# Altium PCB Column.PcbDoc (part 1 of 2)
Units mm, origin at the board's own origin, x right, y up, seen from the top; angles counter-clockwise.
Board outline 110.15 x 30.8 mm, 2 copper layers (Top Layer, Bottom Layer); 69 components, 210 nets, 1010 pads, 61 vias.
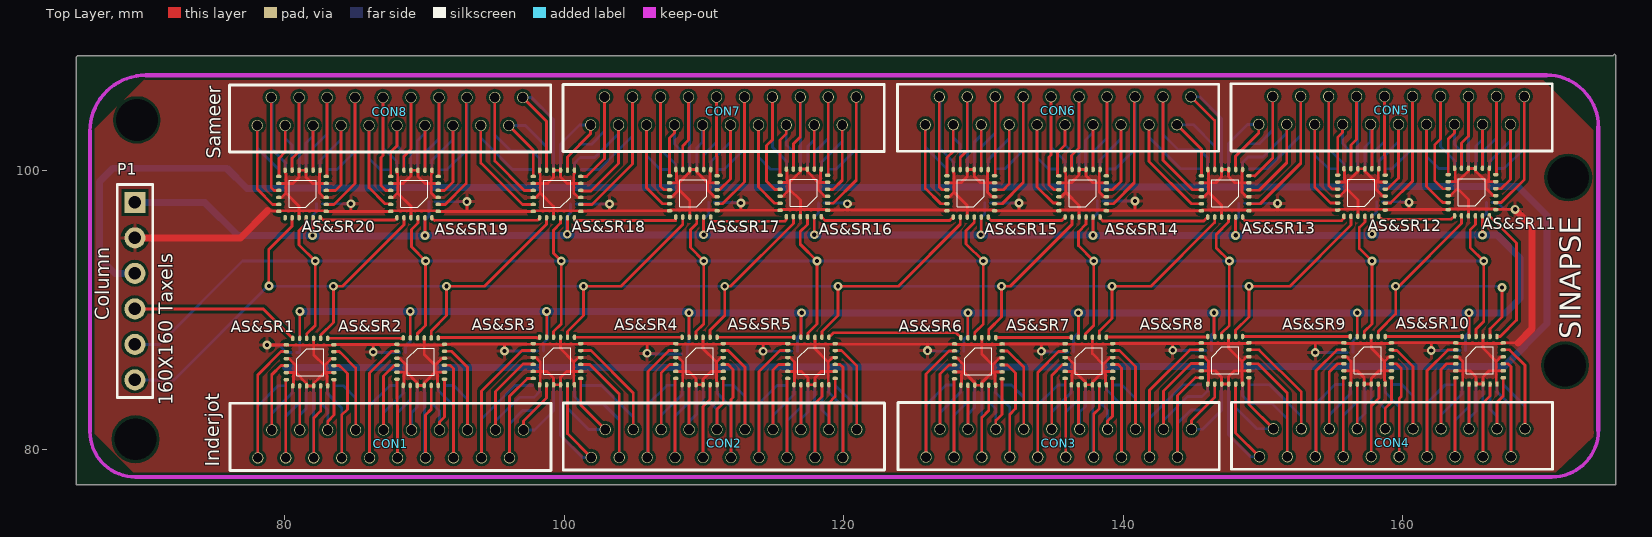
[diagram p0: Top Layer view]
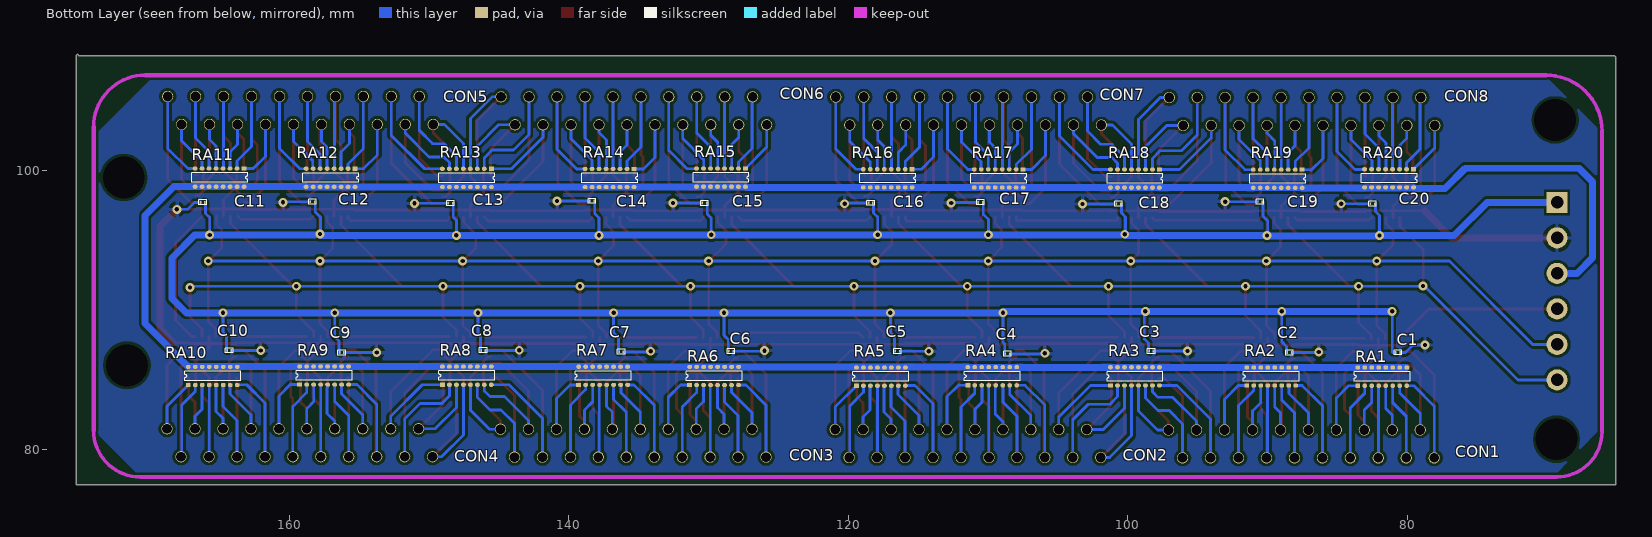
[diagram p1: Bottom Layer view, seen from below]

## Layer stack, top to bottom
Top Solder: solder mask 0.0102, Solder Resist, Dk 3.5
Top Layer: signal copper 0.0356
Dielectric 1: dielectric 0.32, FR-4, Dk 4.8
Bottom Layer: signal copper 0.0356
Bottom Solder: solder mask 0.0102, Solder Resist, Dk 3.5

## Board outline
65.2,108.2 175.05,108.2 175.15,108.3 175.25,108.2 175.25,77.5 65.1,77.5 65.1,78.3 65.1,108.1

## Design rules (kind name [scope] priority, off if disabled: settings)
Clearance [All] p1: gap=0.2 except(0.1: SMDPad-SMDPad THPad-THPad SMDPad-THPad; 0.25: Arc-Arc Arc-THPad Arc-Track Arc-SMDPad)
HoleSize [All] p1: absolutevalues=TRUE maxlimit=6 minlimit=0.3 maxpercent=80.000 minpercent=20.000
HoleToHoleClearance [All] p1: gap=0.3 allowstackedmicrovias=TRUE
MinimumSolderMaskSliver [All] p1: minsoldermaskwidth=0.08
PolygonConnect [All] p1: connectstyle=Relief reliefconductorwidth=0.254 reliefentries=4 polygonreliefangle="90 Angle" airgapwidth=0.254
RoutingCorners [All] p1: cornerstyle=45-Degree minsetback=2 maxsetback=2
RoutingTopology [All] p1: topology=Daisy_Simple
RoutingVias [All] p1: holewidth=0.305 width=0.635 viastyle="Through Hole" minholewidth=0.305 minwidth=0.635 maxholewidth=0.71 maxwidth=1.27
SilkToBoardRegionClearance [All] p1 off:
SilkToSilkClearance [All] p1 off: silktosilkclearance=0
SilkToSolderMaskClearance [All] p1 off: minsilkscreentomaskgap=0 clearancetoexposedcopper=TRUE
SolderMaskExpansion [All] p1: expansion=0.05
UnpouredPolygon [All] p1: allowunpoured=FALSE
Width [All] p1: maxlimit=0.8 minlimit=0.2 preferedwidth=0.2
21 further rules are at their usual default settings.

## Classes and differential pairs
component class Column: AS&SR1 AS&SR2 AS&SR3 AS&SR4 AS&SR5 C1 C2 C3 C4 C5 CON1 CON2 RA2 RA3 RA4 RA5 RA14

## Components (designator, comment, footprint, x,y, rotation, side; value= is the part's Value field where it differs from the comment)
AS&SR1 "ADG1414" LFCSP24 80.14,87.52 r0 top
AS&SR2 "ADG1414" LFCSP24 88.05,87.55 r0 top
AS&SR3 "ADG1414" LFCSP24 97.8,87.6 r0 top
AS&SR4 "ADG1414" LFCSP24 108,87.6 r0 top
AS&SR5 "ADG1414" LFCSP24 116,87.6 r0 top
AS&SR6 "ADG1414" LFCSP24 127.94,87.57 r0 top (schematic designator AS&SR1)
AS&SR7 "ADG1414" LFCSP24 135.85,87.6 r0 top (schematic designator AS&SR2)
AS&SR8 "ADG1414" LFCSP24 145.6,87.65 r0 top (schematic designator AS&SR3)
AS&SR9 "ADG1414" LFCSP24 155.8,87.65 r0 top (schematic designator AS&SR4)
AS&SR10 "ADG1414" LFCSP24 163.8,87.65 r0 top (schematic designator AS&SR5)
AS&SR11 "ADG1414" LFCSP24 166.66,97.18 r180 top (schematic designator AS&SR1)
AS&SR12 "ADG1414" LFCSP24 158.75,97.15 r180 top (schematic designator AS&SR2)
AS&SR13 "ADG1414" LFCSP24 149,97.1 r180 top (schematic designator AS&SR3)
AS&SR14 "ADG1414" LFCSP24 138.8,97.1 r180 top (schematic designator AS&SR4)
AS&SR15 "ADG1414" LFCSP24 130.8,97.1 r180 top (schematic designator AS&SR5)
AS&SR16 "ADG1414" LFCSP24 118.86,97.13 r180 top (schematic designator AS&SR1)
AS&SR17 "ADG1414" LFCSP24 110.95,97.1 r180 top (schematic designator AS&SR2)
AS&SR18 "ADG1414" LFCSP24 101.2,97.05 r180 top (schematic designator AS&SR3)
AS&SR19 "ADG1414" LFCSP24 91,97.05 r180 top (schematic designator AS&SR4)
AS&SR20 "ADG1414" LFCSP24 83,97.05 r180 top (schematic designator AS&SR5)
C1 "Cap" 0402 80.68,86.96 r0 bottom
C2 "Cap" 0402 88.45,86.95 r0 bottom
C3 "Cap" 0402 98.33,87.06 r0 bottom
C4 "Cap" 0402 108.62,86.86 r0 bottom
C5 "Cap" 0402 116.5,87.05 r0 bottom
C6 "Cap" 0402 128.4,87.05 r0 bottom (schematic designator C1)
C7 "Cap" 0402 136.25,87 r0 bottom (schematic designator C2)
C8 "Cap" 0402 146.13,87.11 r0 bottom (schematic designator C3)
C9 "Cap" 0402 156.25,86.95 r0 bottom (schematic designator C4)
C10 "Cap" 0402 164.3,87.1 r0 bottom (schematic designator C5)
C11 "Cap" 0402 166.2,97.7 r180 bottom (schematic designator C1)
C12 "Cap" 0402 158.35,97.75 r180 bottom (schematic designator C2)
C13 "Cap" 0402 148.47,97.64 r180 bottom (schematic designator C3)
C14 "Cap" 0402 138.35,97.8 r180 bottom (schematic designator C4)
C15 "Cap" 0402 130.3,97.65 r180 bottom (schematic designator C5)
C16 "Cap" 0402 118.4,97.65 r180 bottom (schematic designator C1)
C17 "Cap" 0402 110.55,97.7 r180 bottom (schematic designator C2)
C18 "Cap" 0402 100.67,97.59 r180 bottom (schematic designator C3)
C19 "Cap" 0402 90.55,97.75 r180 bottom (schematic designator C4)
C20 "Cap" 0402 82.5,97.6 r180 bottom (schematic designator C5)
CON1 "FFC_CON" FFC_THT_20_1 78.094,79.421 r0 top
CON2 "FFC_CON" FFC_THT_20_1 101.95,79.45 r0 top
CON3 "FFC_CON" FFC_THT_20_1 125.894,79.471 r0 top (schematic designator CON1)
CON4 "FFC_CON" FFC_THT_20_1 149.75,79.5 r0 top (schematic designator CON2)
CON5 "FFC_CON" FFC_THT_20_1 168.706,105.279 r180 top (schematic designator CON1)
CON6 "FFC_CON" FFC_THT_20_1 144.85,105.25 r180 top (schematic designator CON2)
CON7 "FFC_CON" FFC_THT_20_1 120.906,105.229 r180 top (schematic designator CON1)
CON8 "FFC_CON" FFC_THT_20_1 97.05,105.2 r180 top (schematic designator CON2)
P1 "Header 6" HDR1X6 69.3,97.7 r270 top
RA1 "RES_ARR" 0402X8 83.56,84.58 r90 bottom
RA2 "RES_ARR" 0402X8 91.5,84.59 r90 bottom
RA3 "RES_ARR" 0402X8 101.25,84.6 r90 bottom
RA4 "RES_ARR" 0402X8 111.46,84.61 r90 bottom
RA5 "RES_ARR" 0402X8 119.43,84.58 r90 bottom
RA6 "RES_ARR" 0402X8 131.36,84.63 r90 bottom (schematic designator RA1)
RA7 "RES_ARR" 0402X8 139.3,84.64 r90 bottom (schematic designator RA2)
RA8 "RES_ARR" 0402X8 149.05,84.65 r90 bottom (schematic designator RA3)
RA9 "RES_ARR" 0402X8 159.26,84.66 r90 bottom (schematic designator RA4)
RA10 "RES_ARR" 0402X8 167.23,84.63 r90 bottom (schematic designator RA5)
RA11 "RES_ARR" 0402X8 163.24,100.12 r270 bottom (schematic designator RA1)
RA12 "RES_ARR" 0402X8 155.3,100.11 r270 bottom (schematic designator RA2)
RA13 "RES_ARR" 0402X8 145.55,100.1 r270 bottom (schematic designator RA3)
RA14 "RES_ARR" 0402X8 135.34,100.09 r270 bottom (schematic designator RA4)
RA15 "RES_ARR" 0402X8 127.37,100.12 r270 bottom (schematic designator RA5)
RA16 "RES_ARR" 0402X8 115.44,100.07 r270 bottom (schematic designator RA1)
RA17 "RES_ARR" 0402X8 107.5,100.06 r270 bottom (schematic designator RA2)
RA18 "RES_ARR" 0402X8 97.75,100.05 r270 bottom (schematic designator RA3)
RA19 "RES_ARR" 0402X8 87.54,100.04 r270 bottom (schematic designator RA4)
RA20 "RES_ARR" 0402X8 79.57,100.07 r270 bottom (schematic designator RA5)

## Footprints (in the part's own frame and the unit in brackets; to place one, negate y for a bottom-side part, rotate by r counter-clockwise, add the part's x,y. Pads: shape width x height; smd on the part's side, far side on the other; paste and mask are expansions set on the pad)
0402 [mm]
  rect 0.1x0.2 smd mask+0.05: 1(-0.15,0) 2(0.15,0)
  silkscreen extent -0.28,-0.18 0.28,0.18
0402X8 [mm]
  rect 0.3x0.35 smd mask+0.03: 1(0,0)
  oval 0.3x0.35 smd mask+0.03: 2(0,-0.5) 3(0,-1) 4(0,-1.5) 5(0,-2) 6(0,-2.5) 7(0,-3) 8(0,-3.5) 9(1.3,-3.5) 10(1.3,-3) 11(1.3,-2.5) 12(1.3,-2) 13(1.3,-1.5) 14(1.3,-1) 15(1.3,-0.5) 16(1.3,0)
  silkscreen extent 0.32,-3.75 0.98,0.25
FFC_THT_20_1 [mm]
  round 0.8 hole 0.7 mask+0.2: 1(0,0) 2(1,2) 3(2,0) 4(3,2) 5(4,0) 6(5,2) 7(6,0) 8(7,2) 9(8,0) 10(9,2) 11(10,0) 12(11,2) 13(12,0) 14(13,2) 15(14,0) 16(15,2) 17(16,0) 18(17,2) 19(18,0) 20(19,2)
  silkscreen extent -2,-0.9 20.98,3.9
HDR1X6 [mm] "Connector; Header; 6 Position"
  rect 1.5x1.5 hole 0.9: 1(0,0)
  round 1.5 hole 0.9: 2(2.54,0) 3(5.08,0) 4(7.62,0) 5(10.16,0) 6(12.7,0)
  silkscreen extent -1.27,-1.27 13.97,1.27
LFCSP24 [mm]
  oval 0.4x0.25 smd mask+0.05: 1(0,0) 2(0,-0.5) 3(0,-1) 4(0,-1.5) 5(0,-2) 6(0,-2.5) 13(3.4,-2.5) 14(3.4,-2) 15(3.4,-1.5) 16(3.4,-1) 17(3.4,-0.5) 18(3.4,0)
  oval 0.25x0.4 smd mask+0.05: 7(0.45,-2.95) 8(0.95,-2.95) 9(1.45,-2.95) 10(1.95,-2.95) 11(2.45,-2.95) 12(2.95,-2.95) 19(2.95,0.45) 20(2.45,0.45) 21(1.95,0.45) 22(1.45,0.45) 23(0.95,0.45) 24(0.45,0.45)
  silkscreen extent 0.73,-2.21 2.66,-0.29

## Part data
AS&SR1 AS&SR2 AS&SR3 AS&SR4 AS&SR5 AS&SR6 AS&SR7 AS&SR8 AS&SR9 AS&SR10 AS&SR11 AS&SR12 AS&SR13 AS&SR14 AS&SR15 AS&SR16 AS&SR17 AS&SR18 AS&SR19 AS&SR20: "Analog Switches + Shift Registers"
C1 C2 C3 C4 C5 C6 C7 C8 C9 C10 C11 C12 C13 C14 C15 C16 C17 C18 C19 C20: "Capacitor"
CON1 CON2 CON3 CON4 CON5 CON6 CON7 CON8: library part FFC_20pin
P1: "Header, 6-Pin"
RA1 RA2 RA3 RA4 RA5 RA6 RA7 RA8 RA9 RA10 RA11 RA12 RA13 RA14 RA15 RA16 RA17 RA18 RA19 RA20: library part Resistor_Array

## Free pads (board coordinates)
  round 0 hole 3 mask+0: H(69.34,80.75) H(171.62,86.04) H(171.85,99.48)
  round 0 hole 3 paste+0 mask+0: H(69.44,103.6)

## Via types
v1: diameter 0.635, hole 0.305, Top Layer to Bottom Layer, 61 vias

## Nets (pads, with @x,y where several pads share a name; then routed paths per layer and width w, separated by ;. In a path a pad name is that pad's centre, name@x,y a point inside that pad or via, vN(x,y) a via of type N, cw(c..) or ccw(c..) an arc to the next point about the centre after c; other vN are vias at no path point)
C1: AS&SR1.2 CON1.1 RA1.8 | length 15
  Top Layer w0.2: CON1.1@78.094,79.421 78.094,85.367 79.747,87.02 AS&SR1.2@80.14,87.02
  Bottom Layer w0.2: CON1.1@78.094,79.421 78.094,83.134 79.54,84.58 RA1.8@80.06,84.58
C2: AS&SR1.4 CON1.2 RA1.7 | length 9
  Top Layer w0.2: CON1.2@79.094,81.421 79.094,85.367 79.747,86.02 AS&SR1.4@80.14,86.02
  Bottom Layer w0.2: CON1.2@79.094,81.421 79.094,82.594 80.56,84.06 RA1.7@80.56,84.58
C3: AS&SR1.6 CON1.3 RA1.6 | length 11.2
  Top Layer w0.2: CON1.3@80.094,79.421 AS&SR1.6@80.094,84.974 ; AS&SR1.6@80.094,84.974 AS&SR1.6@80.14,85.02 AS&SR1.6@80.094,84.974
  Bottom Layer w0.2: CON1.3@80.094,79.421 80.094,82.394 81.06,83.36 RA1.6@81.06,84.58
C4: AS&SR1.8 CON1.4 RA1.5 | length 6.5
  Top Layer w0.2: AS&SR1.8@81.09,84.57 81.094,84.566 CON1.4@81.094,81.421
  Bottom Layer w0.2: CON1.4@81.094,81.421 81.094,82.494 81.56,82.96 RA1.5@81.56,84.58
C5: AS&SR1.11 CON1.5 RA1.4 | length 10.5
  Top Layer w0.2: CON1.5@82.094,79.421 82.094,82.264 82.59,82.76 AS&SR1.11@82.59,84.57
  Bottom Layer w0.2: RA1.4@82.06,84.58 82.085,84.555 82.085,79.43 CON1.5@82.094,79.421
C6: AS&SR1.13 CON1.6 RA1.3 | length 7.2
  Top Layer w0.2: CON1.6@83.094,81.421 83.094,82.034 83.54,82.48 AS&SR1.13@83.54,85.02
  Bottom Layer w0.2: RA1.3@82.56,84.58 82.56,83.39 83.094,82.856 CON1.6@83.094,81.421
C7: AS&SR1.15 CON1.7 RA1.2 | length 13
  Top Layer w0.2: AS&SR1.15@83.54,86.02 83.933,86.02 84.008,85.945 84.51,85.443 84.51,82.89 84.094,82.474 CON1.7@84.094,79.421
  Bottom Layer w0.2: RA1.2@83.06,84.58 83.06,84.04 84.094,83.006 CON1.7@84.094,79.421
C8: AS&SR1.17 CON1.8 RA1.1 | length 10.7
  Top Layer w0.2: AS&SR1.17@83.54,87.02 83.933,87.02 84.008,86.945 85.094,85.859 CON1.8@85.094,81.421
  Bottom Layer w0.2: RA1.1@83.56,84.58 84.22,84.58 85.094,83.706 CON1.8@85.094,81.421
C9: AS&SR2.2 CON1.9 RA2.8 | length 14.9
  Top Layer w0.2: CON1.9@86.094,79.421 86.094,85.487 87.582,86.975 87.657,87.05 AS&SR2.2@88.05,87.05
  Bottom Layer w0.2: CON1.9@86.094,79.421 86.094,83.144 87.54,84.59 RA2.8@88,84.59
C10: AS&SR2.4 CON1.10 RA2.7 | length 8.9
  Top Layer w0.2: CON1.10@87.094,81.421 87.094,85.27 87.874,86.05 AS&SR2.4@88.05,86.05
  Bottom Layer w0.2: CON1.10@87.094,81.421 87.094,82.644 88.475,84.025 88.475,84.565 RA2.7@88.5,84.59
C11: AS&SR2.6 CON1.11 RA2.6 | length 11.2
  Top Layer w0.2: AS&SR2.6@88.059,85.05 88.059,83.686 88.075,83.67 88.075,83.149 88.094,83.13 CON1.11@88.094,79.421
  Bottom Layer w0.2: CON1.11@88.094,79.421 88.094,82.644 89,83.55 RA2.6@89,84.59
C12: AS&SR2.8 CON1.12 RA2.5 | length 6.6
  Top Layer w0.2: AS&SR2.8@89,84.6 89,81.515 CON1.12@89.094,81.421
  Bottom Layer w0.2: CON1.12@89.094,81.421 89.094,82.644 89.5,83.05 89.5,83.39 RA2.5@89.5,84.59
C13: AS&SR2.11 CON1.13 RA2.4 | length 10.6
  Top Layer w0.2: CON1.13@90.094,79.421 90.094,82.494 90.5,82.9 AS&SR2.11@90.5,84.6
  Bottom Layer w0.2: RA2.4@90,84.59 90.025,84.565 90.025,79.49 CON1.13@90.094,79.421
C14: AS&SR2.13 CON1.14 RA2.3 | length 7.2
  Top Layer w0.2: CON1.14@91.094,81.421 91.094,81.994 91.45,82.35 AS&SR2.13@91.45,85.05
  Bottom Layer w0.2: RA2.3@90.5,84.59 90.5,83.39 90.494,83.384 91.094,82.784 CON1.14@91.094,81.421
C15: AS&SR2.15 CON1.15 RA2.2 | length 12.8
  Top Layer w0.2: AS&SR2.15@91.45,86.05 91.85,86.05 92.094,85.806 CON1.15@92.094,79.421
  Bottom Layer w0.2: RA2.2@91,84.59 91,84.25 92.094,83.156 CON1.15@92.094,79.421
C16: AS&SR2.17 CON1.16 RA2.1 | length 10.8
  Top Layer w0.2: AS&SR2.17@91.45,87.05 91.95,87.05 93.094,85.906 CON1.16@93.094,81.421
  Bottom Layer w0.2: RA2.1@91.5,84.59 92.11,84.59 93.094,83.606 CON1.16@93.094,81.421
C17: AS&SR3.2 CON1.17 RA3.8 | length 17.1
  Top Layer w0.2: CON1.17@94.094,79.421 94.094,84.204 96.99,87.1 AS&SR3.2@97.8,87.1
  Bottom Layer w0.2: CON1.17@94.094,79.421 94.094,82.204 96.49,84.6 RA3.8@97.75,84.6
C18: AS&SR3.4 CON1.18 RA3.7 | length 11.4
  Top Layer w0.2: CON1.18@95.094,81.421 95.094,84.164 97.06,86.13 97.77,86.13 AS&SR3.4@97.8,86.1
  Bottom Layer w0.2: CON1.18@95.094,81.421 95.094,82.044 96.8,83.75 97.85,83.75 98.25,84.15 RA3.7@98.25,84.6
C19: AS&SR3.6 CON1.19 RA3.6 | length 13.4
  Top Layer w0.2: CON1.19@96.094,79.421 96.094,83.824 97.38,85.11 97.39,85.1 AS&SR3.6@97.8,85.1
  Bottom Layer w0.2: CON1.19@96.094,79.421 96.094,81.844 97.05,82.8 97.85,82.8 98.75,83.7 RA3.6@98.75,84.6
C20: AS&SR3.8 CON1.20 RA3.5 | length 8.5
  Top Layer w0.2: CON1.20@97.094,81.421 97.094,82.044 98.75,83.7 AS&SR3.8@98.75,84.65
  Bottom Layer w0.2: CON1.20@97.094,81.421 97.891,81.421 99.25,82.78 RA3.5@99.25,84.6
C21: AS&SR3.11 CON2.1 RA3.4 | length 12.3
  Top Layer w0.2: AS&SR3.11@100.25,84.65 100.25,81.15 CON2.1@101.95,79.45
  Bottom Layer w0.2: RA3.4@99.75,84.6 99.75,81.01 101.31,79.45 CON2.1@101.95,79.45
C22: AS&SR3.13 CON2.2 RA3.3 | length 9.3
  Top Layer w0.2: AS&SR3.13@101.2,85.1 101.2,83.2 CON2.2@102.95,81.45
  Bottom Layer w0.2: RA3.3@100.25,84.6 100.25,82.97 101.77,81.45 CON2.2@102.95,81.45
C23: AS&SR3.15 CON2.3 RA3.2 | length 15.5
  Top Layer w0.2: AS&SR3.15@101.2,86.1 101.84,86.1 103.95,83.99 CON2.3@103.95,79.45
  Bottom Layer w0.2: RA3.2@100.75,84.6 100.75,83.81 101.3,83.26 102.84,83.26 103.95,82.15 CON2.3@103.95,79.45
C24: AS&SR3.17 CON2.4 RA3.1 | length 13.2
  Top Layer w0.2: AS&SR3.17@101.2,87.1 101.92,87.1 104.95,84.07 CON2.4@104.95,81.45
  Bottom Layer w0.2: RA3.1@101.25,84.6 102.69,84.6 104.95,82.34 CON2.4@104.95,81.45
C25: AS&SR4.2 CON2.5 RA4.8 | length 15.1
  Top Layer w0.2: CON2.5@105.95,79.45 106,79.5 106,85.6 107.5,87.1 AS&SR4.2@108,87.1
  Bottom Layer w0.2: CON2.5@105.95,79.45 105.95,83.2 107.36,84.61 RA4.8@107.96,84.61
C26: AS&SR4.4 CON2.6 RA4.7 | length 9.1
  Top Layer w0.2: CON2.6@106.95,81.45 106.95,85.5 107.55,86.1 AS&SR4.4@108,86.1
  Bottom Layer w0.2: CON2.6@106.95,81.45 106.95,82.45 108.46,83.96 RA4.7@108.46,84.61
C27: AS&SR4.6 CON2.7 RA4.6 | length 11.2
  Top Layer w0.2: CON2.7@107.95,79.45 107.95,85.05 AS&SR4.6@108,85.1
  Bottom Layer w0.2: CON2.7@107.95,79.45 107.95,82.4 108.95,83.4 108.95,84.6 RA4.6@108.96,84.61
C28: AS&SR4.8 CON2.8 RA4.5 | length 6.6
  Top Layer w0.2: CON2.8@108.95,81.45 AS&SR4.8@108.95,84.65
  Bottom Layer w0.2: CON2.8@108.95,81.45 108.95,82 109.5,82.55 109.5,84.409 109.46,84.449 RA4.5@109.46,84.61
C29: AS&SR4.11 CON2.9 RA4.4 | length 10.6
  Top Layer w0.2: CON2.9@109.95,79.45 109.95,83.1 110.45,83.6 AS&SR4.11@110.45,84.65
  Bottom Layer w0.2: CON2.9@109.95,79.45 109.96,79.46 RA4.4@109.96,84.61
C30: AS&SR4.13 CON2.10 RA4.3 | length 7.2
  Top Layer w0.2: CON2.10@110.95,81.45 110.95,82.9 111.4,83.35 AS&SR4.13@111.4,85.1
  Bottom Layer w0.2: RA4.3@110.46,84.61 110.45,84.6 110.45,83.4 110.95,82.9 CON2.10@110.95,81.45
C31: AS&SR4.15 CON2.11 RA4.2 | length 12.8
  Top Layer w0.2: AS&SR4.15@111.4,86.1 111.75,86.1 112.1,85.75 112.1,83.75 111.95,83.6 CON2.11@111.95,79.45
  Bottom Layer w0.2: RA4.2@110.96,84.61 110.96,84.04 111.95,83.05 CON2.11@111.95,79.45
C32: AS&SR4.17 CON2.12 RA4.1 | length 10.7
  Top Layer w0.2: AS&SR4.17@111.4,87.1 111.75,87.1 112.95,85.9 CON2.12@112.95,81.45
  Bottom Layer w0.2: RA4.1@111.46,84.61 112.06,84.61 112.1,84.65 112.95,83.8 CON2.12@112.95,81.45
C33: AS&SR5.2 CON2.13 RA5.8 | length 15.2
  Top Layer w0.2: CON2.13@113.95,79.45 113.95,85.6 115.45,87.1 AS&SR5.2@116,87.1
  Bottom Layer w0.2: CON2.13@113.95,79.45 113.95,83.3 115.25,84.6 115.91,84.6 RA5.8@115.93,84.58
C34: AS&SR5.4 CON2.14 RA5.7 | length 9.2
  Top Layer w0.2: CON2.14@114.95,81.45 114.95,85.7 115.35,86.1 AS&SR5.4@116,86.1
  Bottom Layer w0.2: CON2.14@114.95,81.45 114.95,82.45 116.45,83.95 116.45,84.56 RA5.7@116.43,84.58
C35: AS&SR5.6 CON2.15 RA5.6 | length 11.2
  Top Layer w0.2: CON2.15@115.95,79.45 115.95,85.05 AS&SR5.6@116,85.1
  Bottom Layer w0.2: CON2.15@115.95,79.45 115.95,82.05 116.95,83.05 116.95,84.56 RA5.6@116.93,84.58
C36: AS&SR5.8 CON2.16 RA5.5 | length 6.5
  Top Layer w0.2: CON2.16@116.95,81.45 AS&SR5.8@116.95,84.65
  Bottom Layer w0.2: CON2.16@116.95,81.45 116.95,82.2 117.45,82.7 117.45,84.56 RA5.5@117.43,84.58
C37: AS&SR5.11 CON2.17 RA5.4 | length 10.5
  Top Layer w0.2: CON2.17@117.95,79.45 117.95,83.3 118.45,83.8 AS&SR5.11@118.45,84.65
  Bottom Layer w0.2: RA5.4@117.93,84.58 117.93,79.47 CON2.17@117.95,79.45
C38: AS&SR5.13 CON2.18 RA5.3 | length 7.2
  Top Layer w0.2: CON2.18@118.95,81.45 118.95,83.35 119.4,83.8 AS&SR5.13@119.4,85.1
  Bottom Layer w0.2: RA5.3@118.43,84.58 118.45,84.56 118.45,82.85 118.95,82.35 CON2.18@118.95,81.45
C39: AS&SR5.15 CON2.19 RA5.2 | length 12.6
  Top Layer w0.2: AS&SR5.15@119.4,86.1 119.75,86.1 119.95,85.9 CON2.19@119.95,79.45
  Bottom Layer w0.2: RA5.2@118.93,84.58 118.93,84.12 119.9,83.15 119.9,79.5 CON2.19@119.95,79.45
C40: AS&SR5.17 CON2.20 RA5.1 | length 10.3
  Top Layer w0.2: AS&SR5.17@119.4,87.1 119.85,87.1 120.95,86 CON2.20@120.95,81.45
  Bottom Layer w0.2: RA5.1@119.43,84.58 120.95,83.06 CON2.20@120.95,81.45
D10_11: 
DIN: AS&SR1.24 P1.4 | length 12.2
  Top Layer w0.2: P1.4@69.25,90.08 P1.4@69.3,90.08 78.48,90.08 AS&SR1.24@80.59,87.97
GND: AS&SR1.1 AS&SR1.3 AS&SR1.5 AS&SR1.7 AS&SR1.9 AS&SR1.10 AS&SR1.12 AS&SR1.14 AS&SR1.16 AS&SR1.18 AS&SR1.21 AS&SR2.1 AS&SR2.3 AS&SR2.5 AS&SR2.7 AS&SR2.9 AS&SR2.10 AS&SR2.12 AS&SR2.14 AS&SR2.16 AS&SR2.18 AS&SR2.21 AS&SR3.1 AS&SR3.3 AS&SR3.5 AS&SR3.7 AS&SR3.9 AS&SR3.10 AS&SR3.12 AS&SR3.14 AS&SR3.16 AS&SR3.18 AS&SR3.21 AS&SR4.1 AS&SR4.3 AS&SR4.5 AS&SR4.7 AS&SR4.9 AS&SR4.10 AS&SR4.12 AS&SR4.14 AS&SR4.16 AS&SR4.18 AS&SR4.21 AS&SR5.1 AS&SR5.3 AS&SR5.5 AS&SR5.7 AS&SR5.9 AS&SR5.10 AS&SR5.12 AS&SR5.14 AS&SR5.16 AS&SR5.18 AS&SR5.21 AS&SR6.1 AS&SR6.3 AS&SR6.5 AS&SR6.7 AS&SR6.9 AS&SR6.10 AS&SR6.12 AS&SR6.14 AS&SR6.16 AS&SR6.18 AS&SR6.21 AS&SR7.1 AS&SR7.3 AS&SR7.5 AS&SR7.7 AS&SR7.9 AS&SR7.10 AS&SR7.12 AS&SR7.14 AS&SR7.16 AS&SR7.18 AS&SR7.21 AS&SR8.1 AS&SR8.3 AS&SR8.5 AS&SR8.7 AS&SR8.9 AS&SR8.10 AS&SR8.12 AS&SR8.14 AS&SR8.16 AS&SR8.18 AS&SR8.21 AS&SR9.1 AS&SR9.3 AS&SR9.5 AS&SR9.7 AS&SR9.9 AS&SR9.10 AS&SR9.12 AS&SR9.14 AS&SR9.16 AS&SR9.18 AS&SR9.21 AS&SR10.1 AS&SR10.3 AS&SR10.5 AS&SR10.7 AS&SR10.9 AS&SR10.10 AS&SR10.12 AS&SR10.14 AS&SR10.16 AS&SR10.18 AS&SR10.21 AS&SR11.1 AS&SR11.3 AS&SR11.5 AS&SR11.7 AS&SR11.9 AS&SR11.10 AS&SR11.12 AS&SR11.14 AS&SR11.16 AS&SR11.18 AS&SR11.21 AS&SR12.1 AS&SR12.3 AS&SR12.5 AS&SR12.7 AS&SR12.9 AS&SR12.10 AS&SR12.12 AS&SR12.14 AS&SR12.16 AS&SR12.18 AS&SR12.21 AS&SR13.1 AS&SR13.3 AS&SR13.5 AS&SR13.7 AS&SR13.9 AS&SR13.10 AS&SR13.12 AS&SR13.14 AS&SR13.16 AS&SR13.18 AS&SR13.21 AS&SR14.1 AS&SR14.3 AS&SR14.5 AS&SR14.7 AS&SR14.9 AS&SR14.10 AS&SR14.12 AS&SR14.14 AS&SR14.16 AS&SR14.18 AS&SR14.21 AS&SR15.1 AS&SR15.3 AS&SR15.5 AS&SR15.7 AS&SR15.9 AS&SR15.10 AS&SR15.12 AS&SR15.14 AS&SR15.16 AS&SR15.18 AS&SR15.21 AS&SR16.1 AS&SR16.3 AS&SR16.5 AS&SR16.7 AS&SR16.9 AS&SR16.10 AS&SR16.12 AS&SR16.14 AS&SR16.16 AS&SR16.18 AS&SR16.21 AS&SR17.1 AS&SR17.3 AS&SR17.5 AS&SR17.7 AS&SR17.9 AS&SR17.10 AS&SR17.12 AS&SR17.14 AS&SR17.16 AS&SR17.18 AS&SR17.21 AS&SR18.1 AS&SR18.3 AS&SR18.5 AS&SR18.7 AS&SR18.9 AS&SR18.10 AS&SR18.12 AS&SR18.14 AS&SR18.16 AS&SR18.18 AS&SR18.21 AS&SR19.1 AS&SR19.3 AS&SR19.5 AS&SR19.7 AS&SR19.9 AS&SR19.10 AS&SR19.12 AS&SR19.14 AS&SR19.16 AS&SR19.18 AS&SR19.21 AS&SR20.1 AS&SR20.3 AS&SR20.5 AS&SR20.7 AS&SR20.9 AS&SR20.10 AS&SR20.12 AS&SR20.14 AS&SR20.16 AS&SR20.18 AS&SR20.21 C1.1 C2.1 C3.1 C4.1 C5.1 C6.1 C7.1 C8.1 C9.1 C10.1 C11.1 C12.1 C13.1 C14.1 C15.1 C16.1 C17.1 C18.1 C19.1 C20.1 P1.2 | length 480.7
  Top Layer w0.2: v1(78.75,87.5) 80.103,87.5 80.14,87.463 AS&SR1.1@80.14,87.47 ; 78.8,97.1 79.55,97.1 AS&SR20.18@79.6,97.05 79.65,97.1 81.05,97.1 ; AS&SR20.16@79.6,98.05 79.776,98.05 80.1,98.374 ; AS&SR20.14@79.6,99.05 80.1,99.05 ; AS&SR20.12@80.05,100 80.05,99.81 80.1,99.76 80.1,99.05 ; AS&SR1.5@80.14,85.52 80.816,85.52 ; AS&SR1.3@80.14,86.52 80.316,86.52 80.816,86.02 80.816,85.52 ; AS&SR1.1@80.14,87.52 AS&SR1.1@80.14,87.47 ; AS&SR1.7@80.59,84.57 80.64,84.62 80.64,85.344 80.816,85.52 ; AS&SR20.21@81.05,96.6 81.05,97.1 ; AS&SR1.9@81.59,84.57 AS&SR1.10@82.09,84.57 ; AS&SR1.9@81.59,84.746 80.816,85.52 ; AS&SR1.10@82.09,84.746 82.864,85.52 ; AS&SR1.21@82.09,87.97 82.09,87.47 ; AS&SR20.7@82.55,100 82.55,99.82 82.5,99.77 82.5,99.05 ; AS&SR20.3@83,98.05 82.824,98.05 82.5,98.374 82.5,99.05 ; AS&SR20.5@83,99.05 82.5,99.05 ; AS&SR1.12@83.09,84.57 83.04,84.62 83.04,85.344 82.864,85.52 ; AS&SR1.14@83.54,85.52 82.864,85.52 ; AS&SR1.16@83.54,86.52 83.364,86.52 82.864,86.02 ; v1(84.75,97.6) 84.75,97.05 ; v1(86.35,87) 86.35,87.47 ; AS&SR19.16@87.6,98.05 87.776,98.05 88.1,98.374 ; AS&SR19.14@87.6,99.05 88.1,99.05 ; AS&SR2.1@88.03,87.52 AS&SR1.18@83.54,87.52 83.49,87.47 82.09,87.47 ; AS&SR2.5@88.05,85.55 88.726,85.55 ; AS&SR2.3@88.05,86.55 88.226,86.55 88.726,86.05 88.726,85.55 ; AS&SR2.1@88.05,87.55 88.05,87.5 90,87.5 ; AS&SR19.12@88.05,100 88.05,99.776 88.1,99.726 88.1,99.05 ; AS&SR2.7@88.5,84.6 88.55,84.65 88.55,85.374 88.726,85.55 ; AS&SR19.21@89.05,96.6 89.05,97.1 ; AS&SR2.9@89.5,84.6 AS&SR2.10@90,84.6 ; AS&SR2.9@89.5,84.776 88.726,85.55 ; AS&SR2.10@90,84.776 90.774,85.55 ; AS&SR2.21@90,88 90,87.5 ; AS&SR19.7@90.55,100 90.55,99.78 90.5,99.73 90.5,99.05 ; AS&SR2.12@91,84.6 90.95,84.65 90.95,85.374 90.774,85.55 ; AS&SR19.3@91,98.05 90.824,98.05 90.5,98.374 90.5,99.05 ; AS&SR19.5@91,99.05 90.5,99.05 ; AS&SR2.18@91.4,87.5 90,87.5 ; AS&SR2.14@91.45,85.55 90.774,85.55 ; AS&SR2.16@91.45,86.55 91.274,86.55 90.774,86.05 ; AS&SR2.18@91.45,87.55 95.76,87.55 ; v1(93.05,97.75) 93.05,97.05 ; v1(95.75,87.07) 95.75,87.54 95.76,87.55 ; AS&SR3.5@97.8,85.6 98.3,85.6 ; AS&SR3.3@97.8,86.6 97.976,86.6 98.3,86.276 98.3,85.6 ; AS&SR18.16@97.8,98.05 97.976,98.05 98.3,98.374 ; AS&SR18.14@97.8,99.05 98.3,99.05 ; AS&SR3.7@98.25,84.65 98.3,84.7 98.3,85.6 ; AS&SR18.12@98.25,100 98.25,99.78 98.3,99.73 98.3,99.05 ; AS&SR18.21@99.25,96.6 99.25,97.09 99.26,97.1 ; AS&SR3.21@99.75,88.05 99.75,87.56 99.74,87.55 ; AS&SR3.12@100.75,84.65 100.7,84.7 100.7,85.6 ; AS&SR18.7@100.75,100 100.75,99.76 100.7,99.71 100.7,99.05 ; AS&SR3.14@101.2,85.6 100.7,85.6 ; AS&SR3.16@101.2,86.6 101.024,86.6 100.7,86.276 ; AS&SR18.3@101.2,98.05 101.024,98.05 100.7,98.374 100.7,99.05 ; AS&SR18.5@101.2,99.05 100.7,99.05 ; v1(103.25,97.58) 103.25,97.11 103.24,97.1 ; v1(105.95,86.9) 105.95,87.6 ; AS&SR17.18@107.55,97.1 103.24,97.1 ; AS&SR17.16@107.55,98.1 107.726,98.1 108.226,98.6 ; AS&SR17.14@107.55,99.1 108.226,99.1 ; AS&SR17.18@107.6,97.15 109,97.15 ; AS&SR4.5@108,85.6 108.5,85.6 ; AS&SR4.3@108,86.6 108.176,86.6 108.5,86.276 108.5,85.6 ; AS&SR17.12@108,100.05 108.05,100 108.05,99.276 108.226,99.1 ; AS&SR4.7@108.45,84.65 108.5,84.7 108.5,85.6 ; AS&SR17.21@109,96.65 109,97.15 ; AS&SR17.10@109,99.874 108.226,99.1 ; AS&SR17.10@109,100.05 AS&SR17.9@109.5,100.05 ; AS&SR17.9@109.5,99.874 110.274,99.1 ; AS&SR4.21@109.95,88.05 109.95,87.55 ; AS&SR17.7@110.5,100.05 110.45,100 110.45,99.276 110.274,99.1 ; AS&SR4.12@110.95,84.65 110.95,84.874 110.9,84.924 110.9,85.6 ; AS&SR17.1@110.95,97.1 110.95,97.15 109,97.15 ; AS&SR17.3@110.95,98.1 110.774,98.1 110.274,98.6 110.274,99.1 ; AS&SR17.5@110.95,99.1 110.274,99.1 ; AS&SR17.1@110.97,97.13 AS&SR16.18@115.46,97.13 115.51,97.18 116.91,97.18 ; AS&SR4.14@111.4,85.6 110.9,85.6 ; AS&SR4.16@111.4,86.6 111.224,86.6 110.9,86.276 ; 112.65,97.18 v1(112.65,97.65) ; v1(114.25,87.05) 114.25,87.6 ; AS&SR16.16@115.46,98.13 115.636,98.13 116.136,98.63 ; AS&SR16.14@115.46,99.13 116.136,99.13 ; AS&SR16.12@115.91,100.08 115.96,100.03 115.96,99.306 116.136,99.13 ; AS&SR5.5@116,85.6 116.5,85.6 ; AS&SR5.3@116,86.6 116.176,86.6 116.5,86.276 116.5,85.6 ; AS&SR5.7@116.45,84.65 116.5,84.7 116.5,85.6 ; AS&SR16.21@116.91,96.68 116.91,97.18 ; AS&SR16.10@116.91,99.904 116.136,99.13 ; AS&SR16.10@116.91,100.08 AS&SR16.9@117.41,100.08 ; AS&SR16.9@117.41,99.904 118.184,99.13 ; AS&SR5.21@117.95,88.05 117.95,87.55 ; AS&SR16.7@118.41,100.08 118.36,100.03 118.36,99.306 118.184,99.13 ; AS&SR16.1@118.86,97.18 116.91,97.18 ; AS&SR16.3@118.86,98.13 118.684,98.13 118.184,98.63 118.184,99.13 ; AS&SR16.5@118.86,99.13 118.184,99.13 ; AS&SR16.1@118.898,97.15 120.29,97.15 ; AS&SR5.12@118.95,84.65 118.9,84.7 118.9,85.326 118.9,85.6 ; AS&SR5.14@119.4,85.6 118.9,85.6 ; AS&SR5.16@119.4,86.6 119.224,86.6 118.9,86.276 ; v1(120.27,97.6) 120.27,97.17 120.29,97.15 ; v1(126,87.09) 126,87.55 ; AS&SR15.18@127.4,97.1 AS&SR15.18@127.45,97.15 ; AS&SR15.16@127.4,98.1 127.576,98.1 127.9,98.424 ; AS&SR15.14@127.4,99.1 127.9,99.1 ; AS&SR15.12@127.85,100.05 127.85,99.84 127.9,99.79 127.9,99.374 127.9,99.1 ; AS&SR6.5@127.94,85.57 128.616,85.57 ; AS&SR6.3@127.94,86.57 128.116,86.57 128.616,86.07 128.616,85.57 ; AS&SR6.1@127.94,87.57 AS&SR6.1@127.94,87.52 ; AS&SR6.7@128.39,84.62 128.44,84.67 128.44,85.394 128.616,85.57 ; AS&SR15.21@128.85,96.65 128.85,97.15 ; AS&SR6.9@129.39,84.62 AS&SR6.10@129.89,84.62 ; AS&SR6.9@129.39,84.796 128.616,85.57 ; AS&SR6.10@129.89,84.796 130.664,85.57 ; AS&SR6.21@129.89,88.02 129.89,87.52 ; AS&SR15.7@130.35,100.05 130.3,100 130.3,99.1 ; AS&SR15.3@130.8,98.1 130.624,98.1 130.3,98.424 130.3,99.1 ; AS&SR15.5@130.8,99.1 130.3,99.1 ; AS&SR6.12@130.89,84.62 130.84,84.67 130.84,85.394 130.664,85.57 ; AS&SR6.14@131.34,85.57 130.664,85.57 ; AS&SR6.16@131.34,86.57 131.164,86.57 130.664,86.07 ; v1(132.55,97.65) 132.55,97.1 ; v1(134.15,87.05) 134.15,87.52 ; AS&SR14.16@135.4,98.1 135.576,98.1 135.9,98.424 ; AS&SR14.14@135.4,99.1 135.9,99.1 ; AS&SR7.1@135.83,87.57 AS&SR6.18@131.34,87.57 131.29,87.52 129.89,87.52 ; AS&SR7.5@135.85,85.6 136.526,85.6 ; AS&SR7.3@135.85,86.6 136.026,86.6 136.526,86.1 136.526,85.6 ; AS&SR7.1@135.85,87.6 135.85,87.55 137.8,87.55 ; AS&SR14.12@135.85,100.05 135.85,99.826 135.9,99.776 135.9,99.1 ; AS&SR7.7@136.3,84.65 136.35,84.7 136.35,85.424 136.526,85.6 ; AS&SR14.21@136.85,96.65 136.85,97.15 ; AS&SR7.9@137.3,84.65 AS&SR7.10@137.8,84.65 ; AS&SR7.9@137.3,84.826 136.526,85.6 ; AS&SR7.10@137.8,84.826 138.574,85.6 ; AS&SR7.21@137.8,88.05 137.8,87.55 ; AS&SR14.7@138.35,100.05 138.3,100 138.3,99.1 ; AS&SR7.12@138.8,84.65 138.75,84.7 138.75,85.424 138.574,85.6 ; AS&SR14.3@138.8,98.1 138.624,98.1 138.3,98.424 138.3,99.1 ; AS&SR14.5@138.8,99.1 138.3,99.1 ; AS&SR7.18@139.2,87.55 137.8,87.55 ; AS&SR7.14@139.25,85.6 138.574,85.6 ; AS&SR7.16@139.25,86.6 139.074,86.6 138.574,86.1 ; AS&SR7.18@139.25,87.6 143.56,87.6 ; v1(140.85,97.8) 140.85,97.1 ; v1(143.55,87.12) 143.55,87.59 143.56,87.6 ; AS&SR8.5@145.6,85.65 146.1,85.65 ; AS&SR8.3@145.6,86.65 145.776,86.65 146.1,86.326 146.1,85.65 ; AS&SR13.16@145.6,98.1 145.776,98.1 146.1,98.424 ; AS&SR13.14@145.6,99.1 146.1,99.1 ; AS&SR8.7@146.05,84.7 146.1,84.75 146.1,85.65 ; AS&SR13.12@146.05,100.05 146.1,100 146.1,99.1 ; AS&SR13.21@147.05,96.65 147.05,97.14 147.06,97.15 ; AS&SR8.21@147.55,88.1 147.55,87.61 147.54,87.6 ; AS&SR8.12@148.55,84.7 148.5,84.75 148.5,85.65 ; AS&SR13.7@148.55,100.05 148.5,100 148.5,99.1 ; AS&SR8.14@149,85.65 148.5,85.65 ; AS&SR8.16@149,86.65 148.824,86.65 148.5,86.326 ; AS&SR13.3@149,98.1 148.824,98.1 148.5,98.424 148.5,99.1 ; AS&SR13.5@149,99.1 148.5,99.1 ; v1(151.05,97.63) 151.05,97.16 151.04,97.15 ; v1(153.75,86.95) 153.75,87.65 ; AS&SR12.18@155.35,97.15 151.04,97.15 ; AS&SR12.16@155.35,98.15 155.526,98.15 156.026,98.65 ; AS&SR12.14@155.35,99.15 156.026,99.15 ; AS&SR12.18@155.4,97.2 156.8,97.2 ; AS&SR9.5@155.8,85.65 156.3,85.65 ; AS&SR9.3@155.8,86.65 155.976,86.65 156.3,86.326 156.3,85.65 ; AS&SR12.12@155.8,100.1 155.85,100.05 155.85,99.326 156.026,99.15 ; AS&SR9.7@156.25,84.7 156.3,84.75 156.3,85.65 ; AS&SR12.21@156.8,96.7 156.8,97.2 ; AS&SR12.10@156.8,99.924 156.026,99.15 ; AS&SR12.10@156.8,100.1 AS&SR12.9@157.3,100.1 ; AS&SR12.9@157.3,99.924 158.074,99.15 ; AS&SR9.21@157.75,88.1 157.75,87.6 ; AS&SR12.7@158.3,100.1 158.25,100.05 158.25,99.326 158.074,99.15 ; AS&SR9.12@158.75,84.7 158.75,84.924 158.7,84.974 158.7,85.65 ; AS&SR12.1@158.75,97.15 158.75,97.2 156.8,97.2 ; AS&SR12.3@158.75,98.15 158.574,98.15 158.074,98.65 158.074,99.15 ; AS&SR12.5@158.75,99.15 158.074,99.15 ; AS&SR12.1@158.77,97.18 AS&SR11.18@163.26,97.18 163.31,97.23 164.71,97.23 ; AS&SR9.14@159.2,85.65 158.7,85.65 ; AS&SR9.16@159.2,86.65 159.024,86.65 158.7,86.326 ; 160.45,97.23 v1(160.45,97.7) ; v1(162.05,87.1) 162.05,87.65 ; AS&SR11.16@163.26,98.18 163.436,98.18 163.936,98.68 ; AS&SR11.14@163.26,99.18 163.936,99.18 ; AS&SR11.12@163.71,100.13 163.76,100.08 163.76,99.356 163.936,99.18 ; AS&SR10.5@163.8,85.65 164.3,85.65 ; AS&SR10.3@163.8,86.65 163.976,86.65 164.3,86.326 164.3,85.65 ; AS&SR10.7@164.25,84.7 164.3,84.75 164.3,85.65 ; AS&SR11.21@164.71,96.73 164.71,97.23 ; AS&SR11.10@164.71,99.954 163.936,99.18 ; AS&SR11.10@164.71,100.13 AS&SR11.9@165.21,100.13 ; AS&SR11.9@165.21,99.954 165.984,99.18 ; AS&SR10.21@165.75,88.1 165.75,87.6 ; AS&SR11.7@166.21,100.13 166.16,100.08 166.16,99.356 165.984,99.18 ; AS&SR11.1@166.66,97.23 164.71,97.23 ; AS&SR11.3@166.66,98.18 166.484,98.18 165.984,98.68 165.984,99.18 ; AS&SR11.5@166.66,99.18 165.984,99.18 ; AS&SR11.1@166.698,97.2 v1(168.05,97.2) ; AS&SR10.12@166.75,84.7 166.7,84.75 166.7,85.376 166.7,85.65 ; AS&SR10.14@167.2,85.65 166.7,85.65 ; AS&SR10.16@167.2,86.65 167.024,86.65 166.7,86.326 ; 168.25,87.65 AS&SR10.18@167.2,87.65 167.15,87.6 165.75,87.6 ; 80.1,98.374 81.05,97.424 81.05,97.1 ; 80.1,98.374 80.1,98.726 80.1,99.05 ; 80.1,99.05 80.6,99.05 81.05,99.5 AS&SR20.10@81.05,100 AS&SR20.9@81.55,100 81.55,99.5 82,99.05 82.5,99.05 ; AS&SR1.1@80.14,87.47 82.09,87.47 ; 81.05,97.1 83,97.1 AS&SR20.1@83,97.05 84.75,97.05 ; 82.09,87.47 82.09,86.794 82.864,86.02 ; 82.864,85.52 82.864,86.02 ; 84.75,97.05 AS&SR19.18@87.6,97.05 87.65,97.1 89.05,97.1 ; 88.1,98.374 89.05,97.424 89.05,97.1 ; 88.1,98.374 88.1,99.05 ; 88.1,99.05 88.493,99.05 89.05,99.607 AS&SR19.10@89.05,100 AS&SR19.9@89.55,100 89.55,99.55 90.05,99.05 90.5,99.05 ; 89.05,97.1 91,97.1 AS&SR19.1@91,97.05 93.05,97.05 ; 90,87.5 90,86.824 90.774,86.05 ; 90.774,85.55 90.774,86.05 ; 93.05,97.05 AS&SR18.18@97.8,97.05 97.85,97.1 99.26,97.1 ; 95.76,87.55 97.75,87.55 AS&SR3.1@97.8,87.6 97.8,87.55 99.74,87.55 ; 98.3,85.6 98.79,85.6 99.25,85.14 AS&SR3.9@99.25,84.65 AS&SR3.10@99.75,84.65 99.75,85.18 100.17,85.6 100.7,85.6 ; 98.3,98.374 99.26,97.414 99.26,97.1 ; 98.3,98.374 98.3,99.05 ; 98.3,99.05 98.83,99.05 99.25,99.47 AS&SR18.10@99.25,100 AS&SR18.9@99.75,100 99.75,99.51 100.21,99.05 100.7,99.05 ; 99.26,97.1 101.2,97.1 AS&SR18.1@101.2,97.05 101.25,97.1 103.24,97.1 ; 99.74,87.55 99.74,87.236 100.7,86.276 ; 99.74,87.55 101.15,87.55 AS&SR3.18@101.2,87.6 105.95,87.6 ; 100.7,85.6 100.7,86.276 ; 105.95,87.6 AS&SR4.1@108,87.6 108,87.55 109.95,87.55 ; 108.226,98.6 109,97.826 109,97.15 ; 108.226,98.6 108.226,99.1 ; 108.5,85.6 108.95,85.6 109.45,85.1 AS&SR4.9@109.45,84.65 AS&SR4.10@109.95,84.65 109.95,85.043 110.507,85.6 110.9,85.6 ; 109.95,87.55 111.35,87.55 AS&SR4.18@111.4,87.6 114.25,87.6 ; 109.95,87.55 109.95,87.226 110.9,86.276 ; 110.9,85.6 110.9,86.276 ; 114.25,87.6 AS&SR5.1@116,87.6 116,87.55 117.95,87.55 ; 116.136,98.63 116.91,97.856 116.91,97.18 ; 116.136,98.63 116.136,99.13 ; 116.5,85.6 117,85.6 117.45,85.15 AS&SR5.9@117.45,84.65 AS&SR5.10@117.95,84.65 117.95,85.15 118.4,85.6 118.9,85.6 ; 117.95,87.55 117.95,87.226 118.9,86.276 ; 117.95,87.55 119.35,87.55 AS&SR5.18@119.4,87.6 119.45,87.55 126,87.55 ; 118.9,85.6 118.9,85.924 118.9,86.276 ; 120.29,97.15 AS&SR15.18@127.45,97.15 ; 126,87.55 127.903,87.55 127.94,87.513 AS&SR6.1@127.94,87.52 ; AS&SR15.18@127.45,97.15 128.85,97.15 ; 127.9,98.424 127.9,98.776 127.9,99.1 ; 127.9,98.424 128.85,97.474 128.85,97.15 ; 127.9,99.1 128.4,99.1 128.85,99.55 AS&SR15.10@128.85,100.05 AS&SR15.9@129.35,100.05 129.35,99.55 129.8,99.1 130.3,99.1 ; AS&SR6.1@127.94,87.52 129.89,87.52 ; 128.85,97.15 130.8,97.15 AS&SR15.1@130.8,97.1 132.55,97.1 ; 129.89,87.52 129.89,86.844 130.664,86.07 ; 130.664,85.57 130.664,86.07 ; 132.55,97.1 AS&SR14.18@135.4,97.1 135.45,97.15 136.85,97.15 ; 135.9,98.424 135.9,99.1 ; 135.9,98.424 136.85,97.474 136.85,97.15 ; 135.9,99.1 136.293,99.1 136.85,99.657 AS&SR14.10@136.85,100.05 AS&SR14.9@137.35,100.05 137.35,99.6 137.85,99.1 138.3,99.1 ; 136.85,97.15 138.8,97.15 AS&SR14.1@138.8,97.1 140.85,97.1 ; 137.8,87.55 137.8,86.874 138.574,86.1 ; 138.574,85.6 138.574,86.1 ; 140.85,97.1 AS&SR13.18@145.6,97.1 145.65,97.15 147.06,97.15 ; 143.56,87.6 145.55,87.6 AS&SR8.1@145.6,87.65 145.6,87.6 147.54,87.6 ; 146.1,85.65 146.59,85.65 147.05,85.19 AS&SR8.9@147.05,84.7 AS&SR8.10@147.55,84.7 147.55,85.23 147.97,85.65 148.5,85.65 ; 146.1,98.424 146.1,99.1 ; 146.1,98.424 147.06,97.464 147.06,97.15 ; 146.1,99.1 146.63,99.1 147.05,99.52 AS&SR13.10@147.05,100.05 AS&SR13.9@147.55,100.05 147.55,99.56 148.01,99.1 148.5,99.1 ; 147.06,97.15 149,97.15 AS&SR13.1@149,97.1 149.05,97.15 151.04,97.15 ; 147.54,87.6 148.95,87.6 AS&SR8.18@149,87.65 153.75,87.65 ; 147.54,87.6 147.54,87.286 148.5,86.326 ; 148.5,85.65 148.5,86.326 ; 153.75,87.65 AS&SR9.1@155.8,87.65 155.8,87.6 157.75,87.6 ; 156.026,98.65 156.026,99.15 ; 156.026,98.65 156.8,97.876 156.8,97.2 ; 156.3,85.65 156.75,85.65 157.25,85.15 AS&SR9.9@157.25,84.7 AS&SR9.10@157.75,84.7 157.75,85.093 158.307,85.65 158.7,85.65 ; 157.75,87.6 157.75,87.276 158.7,86.326 ; 157.75,87.6 159.15,87.6 AS&SR9.18@159.2,87.65 162.05,87.65 ; 158.7,85.65 158.7,86.326 ; 162.05,87.65 AS&SR10.1@163.8,87.65 163.8,87.6 165.75,87.6 ; 163.936,98.68 163.936,99.18 ; 163.936,98.68 164.71,97.906 164.71,97.23 ; 164.3,85.65 164.8,85.65 165.25,85.2 AS&SR10.9@165.25,84.7 AS&SR10.10@165.75,84.7 165.75,85.2 166.2,85.65 166.7,85.65 ; 165.75,87.6 165.75,87.276 166.7,86.326 ; 166.7,85.65 166.7,85.974 166.7,86.326
  Top Layer w0.5: P1.2@69.3,95.16 76.86,95.16 78.8,97.1 ; v1(168.05,97.2) 169.27,95.98 169.27,88.67 168.25,87.65
  Bottom Layer w0.2: v1(78.75,87.5) 79.6,87.5 80.14,86.96 C1.1@80.48,86.96 ; 82.7,97.6 v1(84.75,97.6) ; v1@86.3,86.95 88.25,86.95 ; 90.75,97.75 v1(93.05,97.75) v1@93.09,97.75 ; v1@95.71,87.06 98.13,87.06 ; 100.87,97.59 v1@103.29,97.59 ; v1@105.96,86.86 108.42,86.86 ; 110.75,97.7 v1@112.65,97.7 ; v1@114.2,87.05 v1(114.25,87.05) C5.1@116.3,87.05 ; 118.6,97.65 120.25,97.65 v1@120.3,97.65 ; v1@126,86.99 v1@126.06,87.05 ; v1@126.02,87.05 v1@126.06,87.05 ; C6.1@128.2,87.05 v1@126.06,87.05 ; 130.5,97.65 132.5,97.65 v1(132.55,97.65) ; v1@134.15,87 v1@134.2,87 ; v1(134.15,87.05) v1@134.2,87 ; C7.1@136.05,87 v1@134.2,87 ; 138.55,97.8 v1(140.85,97.8) v1@140.9,97.8 ; v1@143.56,87.11 C8.1@145.93,87.11 ; 148.67,97.64 151.09,97.64 v1@151.14,97.64 ; v1@153.75,86.9 v1@153.8,86.95 ; v1(153.75,86.95) v1@153.8,86.95 ; C9.1@156.05,86.95 v1@153.8,86.95 ; 158.55,97.75 v1@160.45,97.75 ; v1(162.05,87.1) C10.1@164.1,87.1 ; 166.4,97.7 166.78,97.7 167.28,97.2 v1(168.05,97.2)
  Bottom Layer w0.5: v1@95.71,87.06 95.72,87.07 v1(95.75,87.07) ; v1(103.25,97.58) 103.28,97.58 v1@103.29,97.59 ; v1(105.95,86.9) 105.95,86.85 v1@105.96,86.86 ; v1@120.25,97.65 120.27,97.63 v1(120.27,97.6) ; v1@140.84,97.84 140.85,97.85 v1(140.85,97.8) ; v1(151.05,97.63) 151.08,97.63 v1@151.09,97.64 ; v1@153.75,86.9 v1(153.75,86.95)
NetAS&SR1_19: AS&SR1.19 AS&SR2.24 | length 5.4
  Top Layer w0.2: AS&SR1.19@83.09,87.97 83.09,87.975 88.301,87.975 88.306,87.97 AS&SR2.24@88.47,87.97
NetAS&SR2_19: AS&SR2.19 AS&SR3.24 | length 7.3
  Top Layer w0.2: AS&SR2.19@91,88 91,88.025 98.051,88.025 98.076,88 98.2,88 AS&SR3.24@98.25,88.05
NetAS&SR3_19: AS&SR3.19 AS&SR4.24 | length 7.7
  Top Layer w0.2: AS&SR3.19@100.75,88.05 AS&SR4.24@108.45,88.05
NetAS&SR4_19: AS&SR4.19 AS&SR5.24 | length 5.5
  Top Layer w0.2: AS&SR4.19@110.95,88.05 AS&SR5.24@116.45,88.05
NetAS&SR5_19: AS&SR5.19 AS&SR6.24 | length 9.7
  Top Layer w0.2: AS&SR5.19@118.95,88.05 119.27,88.37 128.04,88.37 AS&SR6.24@128.39,88.02
NetAS&SR6_19: 
NetAS&SR7_19: 
NetAS&SR8_19: 
NetAS&SR9_19: 
NetAS&SR11_19: 
NetAS&SR12_19: 
NetAS&SR13_19: 
NetAS&SR14_19: 
NetAS&SR15_19: 
NetAS&SR16_19: 
NetAS&SR17_19: 
NetAS&SR18_19: 
NetAS&SR19_19: 
NewNet1: AS&SR15.19 AS&SR16.24 | length 9.7
  Top Layer w0.2: AS&SR16.24@118.4,96.68 118.68,96.4 ; 118.69,96.4 127.6,96.4 AS&SR15.19@127.85,96.65
NewNet2: AS&SR6.19 AS&SR7.24 | length 5.4
  Top Layer w0.2: AS&SR6.19@130.89,88.02 130.89,88.025 136.101,88.025 136.106,88.02 AS&SR7.24@136.27,88.02
NewNet3: 
NewNet4: AS&SR7.19 AS&SR8.24 | length 7.3
  Top Layer w0.2: AS&SR7.19@138.8,88.05 138.8,88.075 145.851,88.075 145.876,88.05 146,88.05 AS&SR8.24@146.05,88.1
NewNet5: AS&SR7.17 CON3.16 RA7.1 | length 10.8
  Top Layer w0.2: AS&SR7.17@139.25,87.1 139.75,87.1 140.894,85.956 CON3.16@140.894,81.471
  Bottom Layer w0.2: RA7.1@139.3,84.64 139.91,84.64 140.894,83.656 CON3.16@140.894,81.471
NewNet6: AS&SR7.15 CON3.15 RA7.2 | length 12.8
  Top Layer w0.2: AS&SR7.15@139.25,86.1 139.65,86.1 139.894,85.856 CON3.15@139.894,79.471
  Bottom Layer w0.2: RA7.2@138.8,84.64 138.8,84.3 139.894,83.206 CON3.15@139.894,79.471
NewNet7: AS&SR7.13 CON3.14 RA7.3 | length 7.2
  Top Layer w0.2: CON3.14@138.894,81.471 138.894,82.044 139.25,82.4 AS&SR7.13@139.25,85.1
  Bottom Layer w0.2: RA7.3@138.3,84.64 138.3,83.44 138.294,83.434 138.894,82.834 CON3.14@138.894,81.471
NewNet8: AS&SR7.11 CON3.13 RA7.4 | length 10.6
  Top Layer w0.2: CON3.13@137.894,79.471 137.894,82.544 138.3,82.95 AS&SR7.11@138.3,84.65
  Bottom Layer w0.2: RA7.4@137.8,84.64 137.825,84.615 137.825,79.54 CON3.13@137.894,79.471
NewNet9: 
NewNet10: AS&SR7.8 CON3.12 RA7.5 | length 6.6
  Top Layer w0.2: AS&SR7.8@136.8,84.65 136.8,81.565 CON3.12@136.894,81.471
  Bottom Layer w0.2: CON3.12@136.894,81.471 136.894,82.694 137.3,83.1 137.3,83.44 RA7.5@137.3,84.64
NewNet11: AS&SR7.6 CON3.11 RA7.6 | length 11.2
  Top Layer w0.2: AS&SR7.6@135.859,85.1 135.859,83.736 135.875,83.72 135.875,83.199 135.894,83.18 CON3.11@135.894,79.471
  Bottom Layer w0.2: CON3.11@135.894,79.471 135.894,82.694 136.8,83.6 RA7.6@136.8,84.64
NewNet12: AS&SR7.4 CON3.10 RA7.7 | length 8.9
  Top Layer w0.2: CON3.10@134.894,81.471 134.894,85.32 135.674,86.1 AS&SR7.4@135.85,86.1
  Bottom Layer w0.2: CON3.10@134.894,81.471 134.894,82.694 136.275,84.075 136.275,84.615 RA7.7@136.3,84.64
NewNet13: AS&SR7.2 CON3.9 RA7.8 | length 14.8
  Top Layer w0.2: CON3.9@133.894,79.471 133.894,85.537 135.382,87.025 AS&SR7.2@135.775,87.025
  Bottom Layer w0.2: CON3.9@133.894,79.471 133.894,83.194 135.34,84.64 RA7.8@135.8,84.64
NewNet14: AS&SR8.19 AS&SR9.24 | length 7.7
  Top Layer w0.2: AS&SR8.19@148.55,88.1 AS&SR9.24@156.25,88.1
NewNet15: AS&SR8.17 CON4.4 RA8.1 | length 13.2
  Top Layer w0.2: AS&SR8.17@149,87.15 149.72,87.15 152.75,84.12 CON4.4@152.75,81.5
  Bottom Layer w0.2: RA8.1@149.05,84.65 150.49,84.65 152.75,82.39 CON4.4@152.75,81.5
NewNet16: AS&SR8.15 CON4.3 RA8.2 | length 15.5
  Top Layer w0.2: AS&SR8.15@149,86.15 149.64,86.15 151.75,84.04 CON4.3@151.75,79.5
  Bottom Layer w0.2: RA8.2@148.55,84.65 148.55,83.86 149.1,83.31 150.64,83.31 151.75,82.2 CON4.3@151.75,79.5
NewNet17: AS&SR8.13 CON4.2 RA8.3 | length 9.3
  Top Layer w0.2: AS&SR8.13@149,85.15 149,83.25 CON4.2@150.75,81.5
  Bottom Layer w0.2: RA8.3@148.05,84.65 148.05,83.02 149.57,81.5 CON4.2@150.75,81.5
NewNet18: AS&SR8.11 CON4.1 RA8.4 | length 12.3
  Top Layer w0.2: AS&SR8.11@148.05,84.7 148.05,81.2 CON4.1@149.75,79.5
  Bottom Layer w0.2: RA8.4@147.55,84.65 147.55,81.06 149.11,79.5 CON4.1@149.75,79.5
NewNet19: AS&SR8.8 CON3.20 RA8.5 | length 8.5
  Top Layer w0.2: CON3.20@144.894,81.471 144.894,82.094 146.55,83.75 AS&SR8.8@146.55,84.7
  Bottom Layer w0.2: CON3.20@144.894,81.471 145.691,81.471 147.05,82.83 RA8.5@147.05,84.65
NewNet20: AS&SR8.6 CON3.19 RA8.6 | length 13.4
  Top Layer w0.2: CON3.19@143.894,79.471 143.894,83.874 145.18,85.16 145.19,85.15 AS&SR8.6@145.6,85.15
  Bottom Layer w0.2: CON3.19@143.894,79.471 143.894,81.894 144.85,82.85 145.65,82.85 146.55,83.75 RA8.6@146.55,84.65
NewNet21: AS&SR8.4 CON3.18 RA8.7 | length 11.4
  Top Layer w0.2: CON3.18@142.894,81.471 142.894,84.214 144.86,86.18 145.57,86.18 AS&SR8.4@145.6,86.15
  Bottom Layer w0.2: CON3.18@142.894,81.471 142.894,82.094 144.6,83.8 145.65,83.8 146.05,84.2 RA8.7@146.05,84.65